# EAGLE board lpc1347 (EAGLE 6.2)
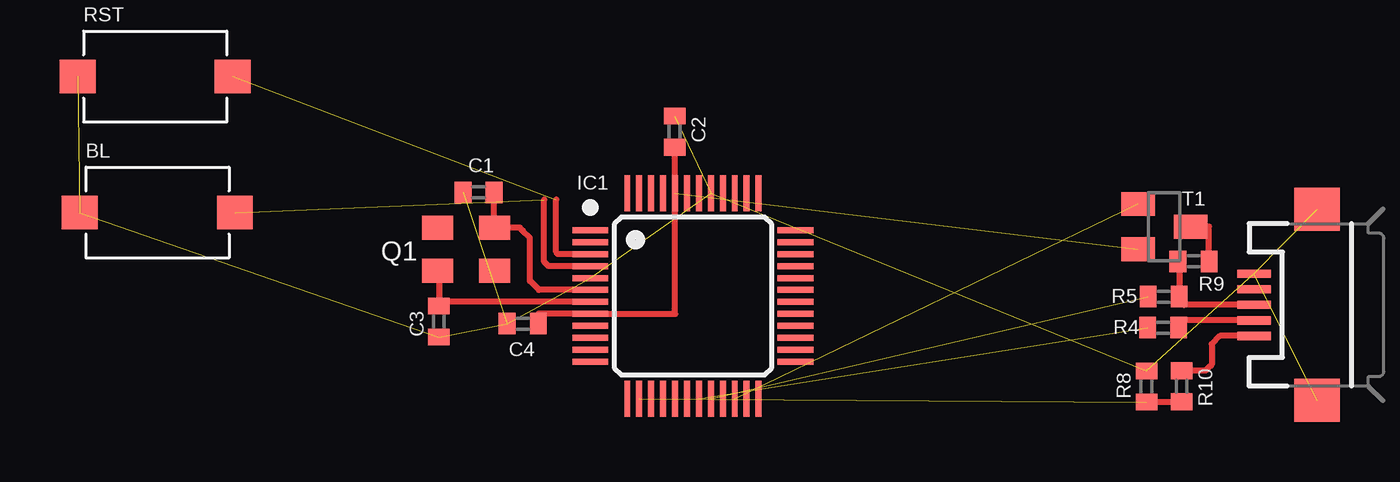
[diagram p0: board, top side]

No outline drawn. Coordinates in mm, seen from the top.
Copper layers (1*16): Top 0.035mm / dielectric 1.5mm / Bottom 0.035mm
Design rules: minimum track width 10mil, minimum drill 24mil, track to track 8mil, track to pad 8mil, pad to pad 8mil, via to via 8mil, smd to smd 8mil, copper to edge 40mil, drill to drill 8mil, minimum pad ring 10mil, minimum via ring 8mil, stop-mask expansion 4mil, vias tented up to drill 0mil, thermal gap 10mil

## Footprints (pad centres in the part's own frame; a part is rotated, then mirrored left to right if it is on the bottom)
SWITCH_MCTAEF = smd 1.5 x 1.4: 1 -3.25,0; 2 3.25,0
C0402 = smd 0.7 x 0.9: 1 -0.65,0; 2 0.65,0
LQFP48 = smd 1.5 x 0.25: 1 -4.3,2.75; 2 -4.3,2.25; 3 -4.3,1.75; 4 -4.3,1.25; 5 -4.3,0.75; 6 -4.3,0.25; 7 -4.3,-0.25; 8 -4.3,-0.75; 9 -4.3,-1.25; 10 -4.3,-1.75; 11 -4.3,-2.25; 12 -4.3,-2.75; 25 4.3,-2.75; 26 4.3,-2.25; 27 4.3,-1.75; 28 4.3,-1.25; 29 4.3,-0.75; 30 4.3,-0.25; 31 4.3,0.25; 32 4.3,0.75; 33 4.3,1.25; 34 4.3,1.75; 35 4.3,2.25; 36 4.3,2.75 | smd 0.25 x 1.5: 13 -2.75,-4.3; 14 -2.25,-4.3; 15 -1.75,-4.3; 16 -1.25,-4.3; 17 -0.75,-4.3; 18 -0.25,-4.3; 19 0.25,-4.3; 20 0.75,-4.3; 21 1.25,-4.3; 22 1.75,-4.3; 23 2.25,-4.3; 24 2.75,-4.3; 37 2.75,4.3; 38 2.25,4.3; 39 1.75,4.3; 40 1.25,4.3; 41 0.75,4.3; 42 0.25,4.3; 43 -0.25,4.3; 44 -0.75,4.3; 45 -1.25,4.3; 46 -1.75,4.3; 47 -2.25,4.3; 48 -2.75,4.3
MT = smd 1.3 x 1: 1 1.2,0.9; 2 -1.2,0.9; 3 -1.2,-0.9; 4 1.2,-0.9
R0402 = smd 0.7 x 0.9: 1 -0.65,0; 2 0.65,0
SOT23 = smd 1 x 1.4: 1 -0.95,-1.1; 2 0.95,-1.1; 3 0,1.1
USB-MICROB = smd 0.35 x 1.4: D+ 0,2.65; D- -0.65,2.65; GND 1.3,2.65; ID 0.65,2.65; VBUS -1.3,2.65 | smd 1.8 x 1.9: MT1 -4,0; MT2 4,0

## Placement (x,y rotation side)
BL  SWITCH_MCTAEF  [SWITCH_MCTAEF]  1.7,17.46 0 top
C1  22pF  [C0402]  15.15,18.31 0 top
C2  100nF  [C0402]  23.36,20.85 270 top
C3  22pF  [C0402]  13.49,12.9 90 top
C4  100nF  [C0402]  17,12.81 0 top
IC1  [LQFP48]  24.13,13.97 0 top
Q1  12Mhz  [MT]  14.63,15.93 180 top
R4  33R  [R0402]  43.82,12.64 0 top
R5  33R  [R0402]  43.84,13.94 0 top
R8  15k  [R0402]  43.12,10.18 270 top
R9  1k5  [R0402]  45.09,15.42 0 top
R10  15k  [R0402]  44.59,10.19 270 top
RST  SWITCH_MCTAEF  [SWITCH_MCTAEF]  1.61,23.16 0 top
T1  Si2301DS  [SOT23]  43.87,16.87 270 top
X1  USB-MICROB  [USB-MICROB]  50.27,13.6 90 top

## Library data of the parts
BL Q1 RST = seb
C1-C4 R4 R5 R8-R10 = rcl
IC1 = microbuilder
T1 = SparkFun
X1 = SparkFun-Connectors

## Nets
01: BL.2 IC1.4
06: IC1.22 T1.1
+3V3: C2.2 C4.2 IC1.8 IC1.44 T1.2
+5V: R10.1 X1.VBUS
GND: BL.1 C1.1 C2.1 C3.1 C4.1 IC1.5 IC1.41 R8.1 RST.1 X1.GND X1.MT1 X1.MT2
N$3: C3.2 IC1.7 Q1.1
N$4: C1.2 IC1.6 Q1.3
N$10: R5.2 R9.1 X1.D+
N$11: R4.2 X1.D-
N$14: IC1.19 R4.1
N$20: R9.2 T1.3
N$24: IC1.20 R5.1
RST: IC1.3 RST.2
VBUS: IC1.14 R8.2 R10.2

## Tracks (layer width: path | path; a pad name or v marks a point on that pad's centre or on a via)
01  (1 unrouted)
  Top 0.25: IC1.4 18.08,15.22 17.9,15.4 17.9,18
06  (1 unrouted)
+3V3  (1 unrouted)
  Top 0.25: C4.2 17.65,13.22 IC1.8 23.38,13.22 IC1.44 23.38,20.2 C2.2
+5V
  Top 0.25: X1.VBUS 46.2,12.3 45.85,11.95 45.85,11.1 45.7,10.95 45.59,10.84 R10.1
GND  (11 unrouted)
N$3
  Top 0.25: IC1.7 13.49,13.72 C3.2 13.49,15.03 Q1.1
N$4
  Top 0.25: C1.2 15.8,16.83 Q1.3 16.87,16.83 17,16.7 17.3,16.4 17.3,14.6 17.68,14.22 IC1.6
N$10
  Top 0.25: X1.D+ 44.69,13.6 44.49,13.8 R5.2 44.49,15.35 R9.1
N$11
  Top 0.25: X1.D- 44.53,12.95 R4.2
N$14  (1 unrouted)
N$20
  Top 0.25: R9.2 45.74,16.87 T1.3
N$24  (1 unrouted)
RST  (1 unrouted)
  Top 0.25: IC1.3 18.48,15.72 18.4,15.8 18.4,18
VBUS  (1 unrouted)
  Top 0.25: R10.2 R8.2

## Text on the board
tNames: Q1
tValues: 12Mhz | lpc1347